# Altium PCB UKU205.PcbDoc (part 2 of 3)
Units mm, origin at the board's own origin, x right, y up, seen from the top; angles counter-clockwise.
Board outline 374.65 x 264.35 mm, 2 copper layers (Top Layer, Bottom Layer); 253 components, 433 nets, 927 pads, 929 vias.
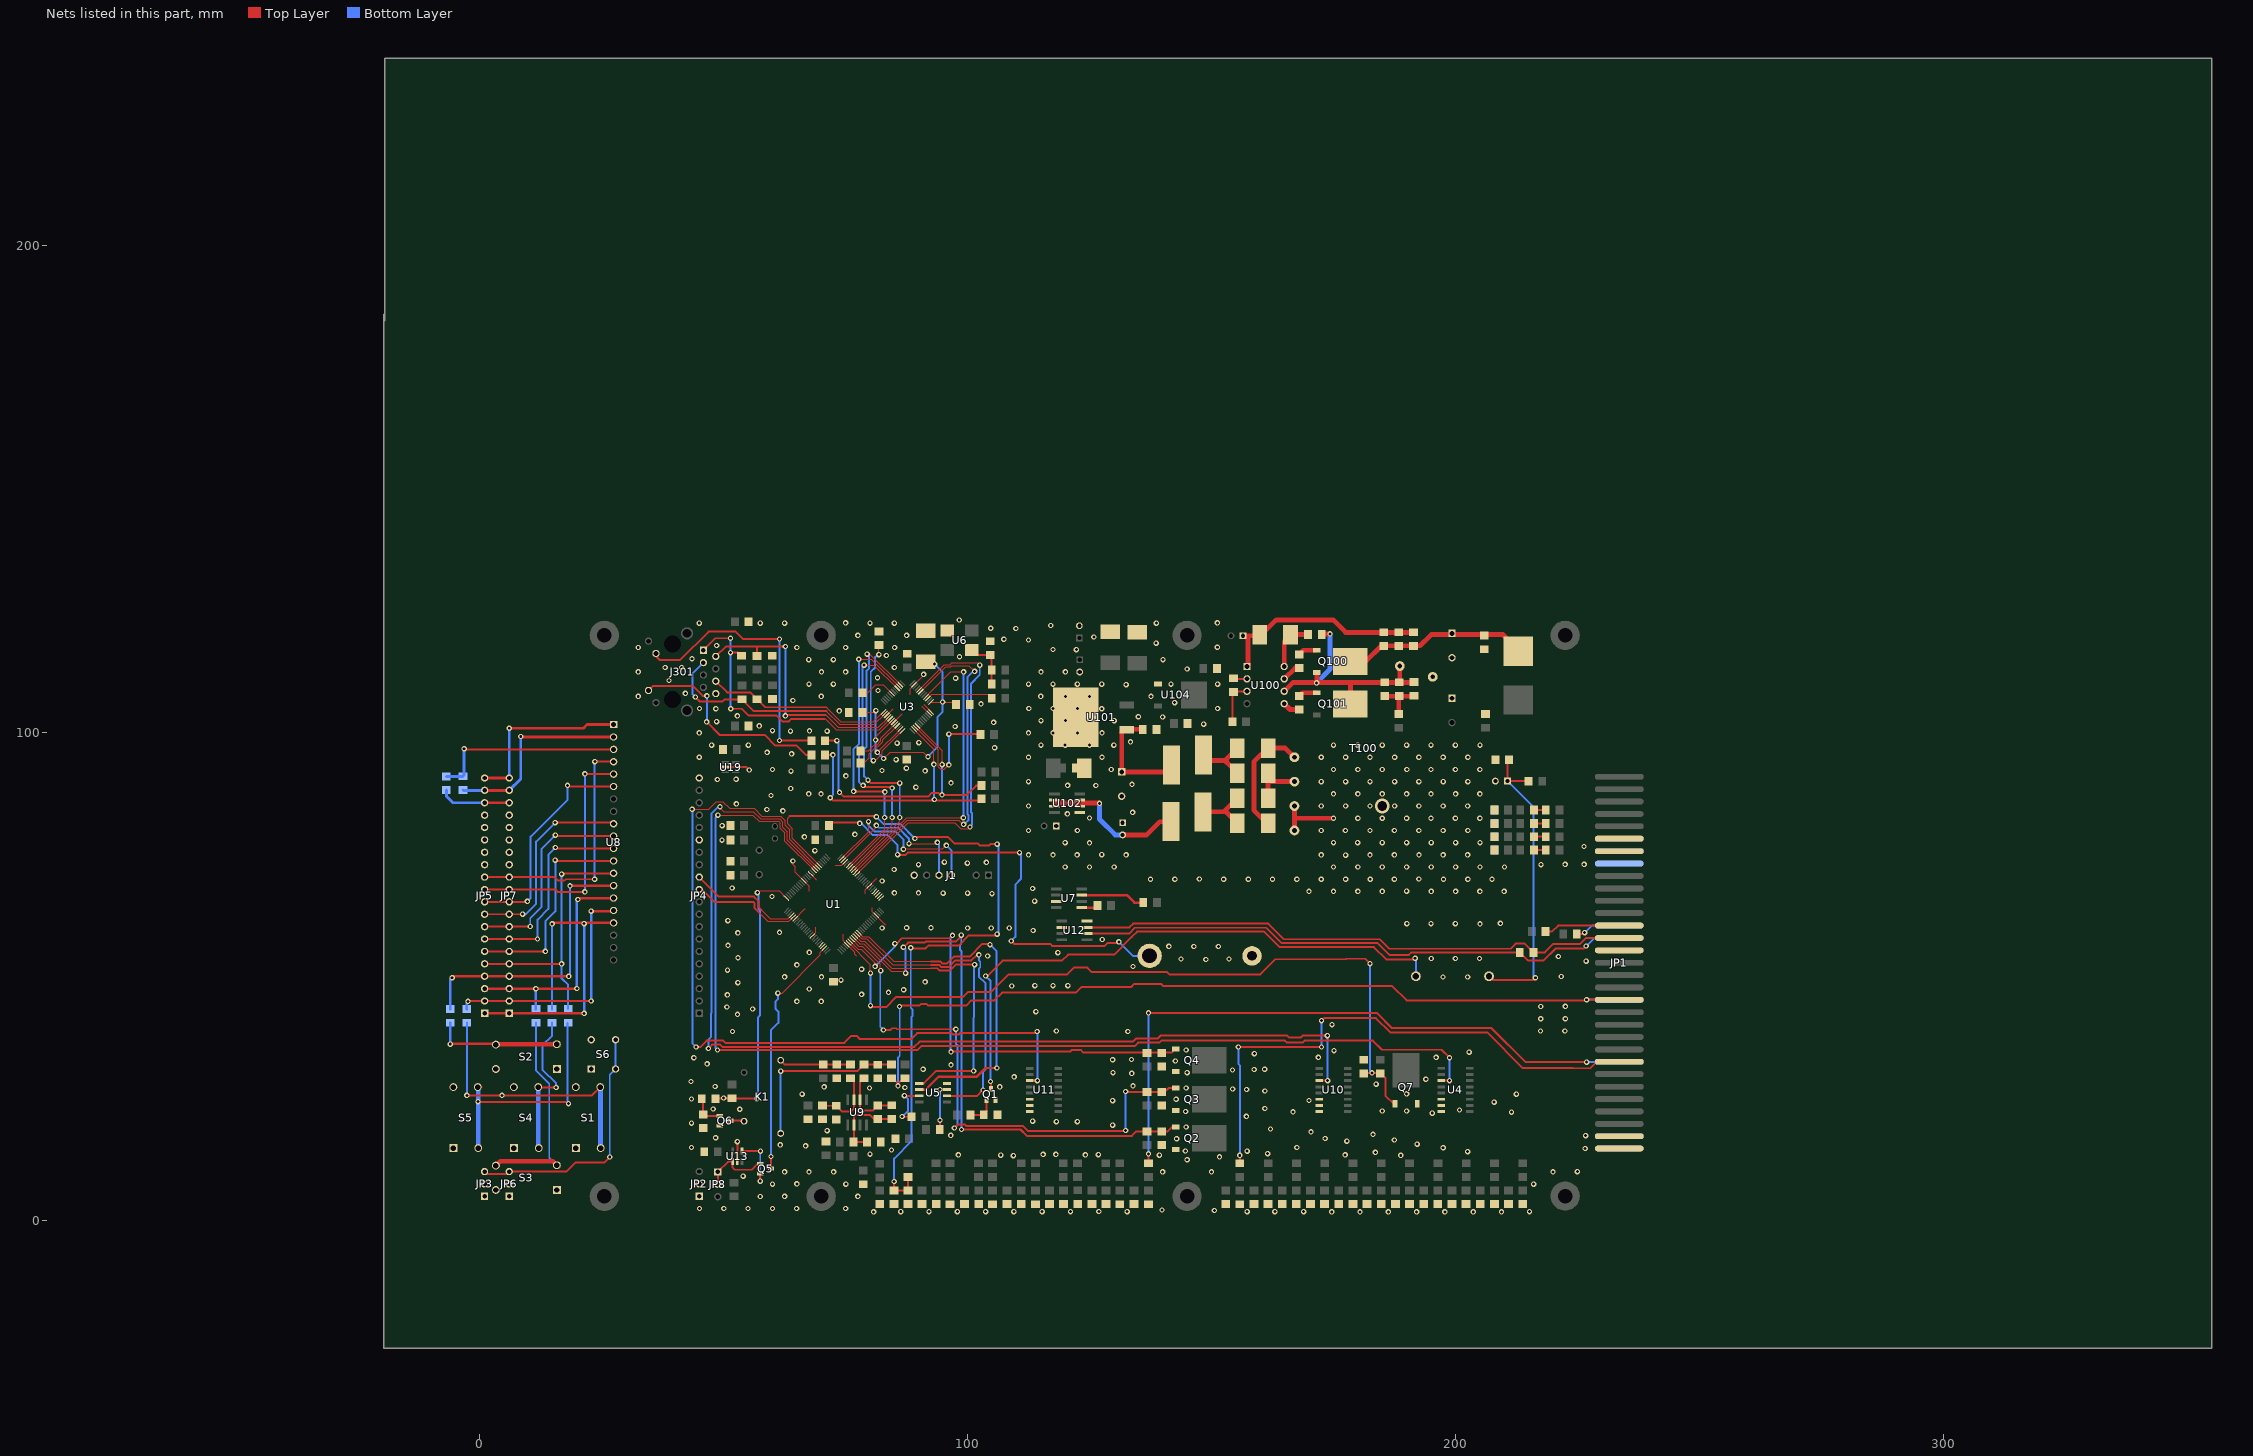
[diagram p2: the nets of this part, all layers, seen from the top]

## Via types
v1: diameter 1.1, hole 0.6, Top Layer to Bottom Layer, 928 vias
v2: diameter 3, hole 2, Top Layer to Bottom Layer, 1 vias

## Nets (pads, with @x,y where several pads share a name; then routed paths per layer and width w, separated by ;. In a path a pad name is that pad's centre, name@x,y a point inside that pad or via, vN(x,y) a via of type N, cw(c..) or ccw(c..) an arc to the next point about the centre after c; other vN are vias at no path point) (continued)
-IAKB: JP1.37 JP1.38 R61.2 R62.2 | length 177.7
  Top Layer w0.4: R61.2@84.393,29.212 84.588,29.212 v1@85.75,28.05 ; v1@85.719,28.081 86.938,29.3 R62.2@87.2,29.3 ; v1(86.05,43.9) 86.3,44.15 90.2,44.15 90.45,44.4 91.6,44.4 91.85,44.15 99.8,44.15 100.8,45.15 105.5,45.15 107.1,46.75 122.2,46.75 123.35,47.9 133.5,47.9 134.1,48.5 139.75,48.5 140.15,48.1 187.05,48.1 190,45.15 226.75,45.15 v1(226.9,45.3) ; v1(226.9,45.3) JP1.37@233.589,45.3
  Bottom Layer w0.4: v1@85.75,28.05 85.75,33.45 86.1,33.8 v1@86.1,43.95 ; v1(226.9,45.3) 233.564,45.3 JP1.38@233.589,45.275
  other v1: 85.75,27.65
-UOUT: 
CANH: JP1.27 R129.2 U12.7 | length 114
  Top Layer w0.4: U12.7@124.489,60.132 133.182,60.132 133.95,60.9 161.65,60.9 164.85,57.7 184.5,57.7 186.45,55.75 211.3,55.75 212.35,56.8 214.181,56.8 R129.2@215.988,54.993 218.343,54.993 220.1,56.75 225.55,56.75 226.75,57.95 JP1.27@233.589,57.95
CANL: JP1.28 R129.1 U12.6 | length 114.6
  Top Layer w0.4: U12.6@124.489,58.862 133.112,58.862 134.3,60.05 161.25,60.05 164.4,56.9 184.05,56.9 186.45,54.5 190.45,54.5 190.9,54.95 213.05,54.95 R129.1@213.1,55 ; R129.1@213.188,54.993 214.831,53.35 218.1,53.35 220.55,55.8 226.3,55.8 v1(226.8,56.3)
  Bottom Layer w0.4: v1(226.8,56.3) 228.45,57.95 JP1.28@233.589,57.95
DB4: 
GND: BT1.2 C1.2 C2.2 C3.2 C4.2 C5.2 C6.2 C7.2 C8.2 C9.2 C10.2 C11.1 C12.2 C13.2 C15.1 C16.1 C17.1 C18.2 C19.2 C20.2 C21.1 C22.1 C23.2 C24.1 C25.1 C31.1 C33.1 C34.2 C35.2 C36.1 C37.1 C38.1 C39.1 C40.1 C41.1 C42.2 C43.2 C44.2 C45.2 C46.2 C47.2 C48.2 C49.2 C50.2 C51.2 C52.2 C53.2 C54.2 C55.2 C56.2 C57.1 C58.2 C101.2 C102.2 C104.1 C105.1 C109.1 C110.2 C301.1 C302.1 C303.1 C304.1 D1.1 D3.1 D4.1 D5.1 D7.1 D8.1 J1.7 J301.8 JP1.11 JP1.12 JP1.13 JP1.14 JP1.59 JP1.60 JP1.61 JP1.62 JP2.1 JP2.2 JP4.20 Q1.2 Q2.3 Q3.3 Q4.3 Q6.2 Q7.3 R10.2 R12.2 R13.2 R14.2 R15.2 R16.2 R23.1 R24.1 R26.1 R27.1 R28.1 R36.1 R49.1 R57.1 R58.1 R60.1 R74.2 R75.2 R76.2 R77.2 R78.2 R111.1 R112.1 R113.1 R114.1 R117.1 R118.1 R122.2 R126.2 R127.2 R128.2 T100.4 T100.5 U1.11 U1.15 U1.31 U1.41 U1.55 U1.72 U1.83 U1.97 U3.15 U3.19 U3.35 U3.36 U3.47 U4.6 U4.7 U4.8 U5.4 U6.2 U7.3 U10.6 U10.7 U10.8 U11.6 U11.7 U11.8 U12.2 U12.8 U13.2 U19.2 U101.2 U102.5 U104.1 | length 66.5
  Top Layer w0.25: v1@64,73.25 64.7,72.55 64.7,71.386 67.5,68.586 67.5,67.5 ; U1.31@64.645,61.895 66.65,63.9 66.7,63.9 ; U1.11@67.827,71.087 69,69.914 69,69.9 ; U1.41@68.181,58.359 68.9,59.078 68.9,60.2 ; 72.9,72.85 74.186,72.85 U1.97@74.898,73.562 ; 74.5,58.7 74.5,57.343 76.85,54.993 76.85,54.604 77.142,54.312 ; 79.05,67 79.05,67.814 81.4,70.164 ; 80.5,63.364 83.15,60.714 83.15,60.7 ; 80.5,63.364 80.5,64.15 ; U3.15@83.448,103.597 84.751,104.9 ; U3.19@84.862,102.183 86.579,103.9 ; 88.2,107.8 88.2,109.056 v1@91,111.856 ; 90.65,105.5 90.65,105.481 U3.35@92.18,103.95 ; 90.988,105.85 U3.36@92.534,104.304
  Top Layer w0.4: U19.2@50.334,92.992 54.658,92.992 v1(55.25,92.4) ; U13.2@52.8,12.125 v1(52.8,16.2)
  Top Layer w1: T100.4@167,80 T100.5@167,85 ; 167,82.5 v1(175,82.5)
  other v1: 80.75,1.8 174.65,1.8 180.45,1.8 186.25,1.8 192.05,1.8 197.85,1.8 203.65,1.8 209.45,1.8 86.3,1.85 92.1,1.85 97.9,1.85 103.7,1.85 109.5,1.85 115.3,1.85 121.1,1.85 132.7,1.85 157.299,1.85 162.999,1.85 168.899,1.85 215.199,1.85 126.9,1.9 150.6,2.1 139.85,2.2 45.05,2.5 50.05,2.5 55,2.5 60,2.5 64.95,2.5 75,2.5 57.5,4.95 62.5,5 77.5,5 60,7.5 75.05,7.5 216.05,7.5 65,7.55 54,9.15 62.5,10 62.5,10 67.5,10 72.55,10 140,10 150,10 219.999,10 224.999,10.05 145,12.5 151.65,13.1 109.4,13.35 188.799,13.4 106.8,13.45 139.3,13.45 98.1,13.5 124.15,13.5 177.399,13.5 126.8,13.55 115.5,13.6 118.1,13.6 80,13.65 161.499,13.75 183.6,14 202.499,14.15 157.299,14.25 144.65,14.3 84.4,14.5 226.599,14.8 197.499,14.95 43.4,15 167.499,15 66.8,15.35 61.6,15.55 192.15,15.7 177.75,16.3 187.499,16.55 142.85,16.8 173.299,16.85 48.35,17 226.699,17.45 96.55,17.5 183.1,17.7 170.399,18.2 71.2,18.45 162.1,18.8 144.8,19.2 129.75,19.6 43.4,20 118.2,20.3 122.5,20.3 113.35,20.4 157.15,21.4 195.25,22.05 211.499,22.25 166.7,22.3 144.7,22.4 184.999,22.5 190,22.5 200.85,22.7 53.3,22.85 47.85,22.9 160.95,23 207.95,24.3 129.75,24.6 169.999,24.65 142.75,24.9 43.4,24.95 66.1,25.95 212.499,25.95 189.999,26 160.95,26.6 157.199,26.9 154.35,27 79.9,27.2 144.8,27.2 87.15,27.3 70.6,27.45 106.6,27.45 48.25,27.5 133.9,27.65 183.75,28 43.3,28.55 193.95,29 109.55,29.5 133.65,30.2 129.8,30.35 145,30.35 154.3,30.9 158.75,31 90.9,31.05 160.899,31.05 96.6,31.95 46.6,32.15 142.6,32.75 129.75,33 133.6,33.05 43.9,33.4 171.9,33.5 196.05,33.5 158.799,34.25 202.8,34.55 175.099,34.85 144.8,35 51.8,38.8 132.85,38.8 118.2,38.9 217.45,38.9 222.45,38.9 174.7,40.2 217.5,41.4 222.55,41.4 52.85,42.3 114,42.85 55.95,43.4 50.65,43.8 217.5,43.9 222.55,43.95 65,44.95 70,44.95 50.75,46.3 78.3,46.4 83.8,46.8 86.9,47.35 67.55,47.5 109.05,48.1 113.8,48.2 117.5,48.2 120.55,48.2 52.9,48.8 91.3,48.95 74.05,49.3 197.45,49.95 202.5,49.95 62.5,50 70.05,50 221.7,50.05 50.8,51.35 78.3,51.55 133.9,52.1 65,52.45 226.8,53.2 148.85,53.55 143.75,53.65 153.6,53.65 195.05,53.75 200,53.75 204.95,53.75 52.95,53.9 221.1,54.15 104.1,54.25 118.5,54.95 67.55,55 146.4,56.2 151.4,56.2 141.25,56.25 50.9,56.45 127.6,57.65 52.9,59 61.45,59.1 113.45,59.5 82.5,60 100,60 104.85,60 108.55,60 87.5,60.05 92.5,60.05 205.05,60.85 190.05,60.9 195,60.9 200,60.9 209.2,60.95 50.85,61.5 113.75,65.5 59.9,66.45 105,67.05 95,67.15 100,67.15 85,67.2 89.95,67.2 170,67.5 175,67.5 179.999,67.5 184.999,67.5 195.05,67.5 200.05,67.5 205,67.5 210,67.5 189.999,67.55 113.35,68.1 51.75,68.2 82.5,69.65 137.5,70 142.5,70 152.5,70 157.55,70 162.5,70 167.5,70 172.499,70 177.499,70 182.55,70 187.499,70 197.55,70 202.55,70 207.5,70 147.5,70.05 192.499,70.05 84.95,72 120,72.5 125,72.5 130.05,72.5 174.999,72.5 180,72.5 185,72.5 189.999,72.5 195.05,72.5 200.05,72.5 205.05,72.5 210.05,72.5 89.95,73 217.55,73 222.499,73.05 226.399,73.05 99.95,73.3 103.85,73.45 95.25,73.5 64.2,73.75 177.499,74.95 112.5,75 117.5,75 122.45,75 132.5,75 172.499,75 182.5,75 187.499,75 192.55,75 197.499,75 202.5,75 127.5,75.05 68.7,75.85 226.35,76.7 125,77.45 120,77.5 174.999,77.5 179.95,77.5 185,77.5 189.999,77.5 195.05,77.5 200.05,77.5 205.05,77.5 49.65,78 66.55,78.7 76.9,79.2 112.5,80 122.5,80 172.5,80 177.45,80 182.5,80 187.5,80 192.5,80 197.499,80 202.55,80 49.7,81 179.999,82.5 184.999,82.5 190,82.5 195,82.5 200,82.5 205,82.5 125,82.55 120.45,83.4 133.85,83.7 62.15,84 58.85,84.3 112.5,85 172.499,85 177.499,85 182.499,85 187.55,85 192.499,85 197.499,85 202.499,85 52.6,85.45 59.7,87.15 67.45,87.5 69.95,87.5 174.999,87.5 180,87.5 185,87.5 189.999,87.5 194.999,87.5 200.05,87.5 205,87.5 63.75,88.6 89.4,88.85 126.3,89.2 120.5,89.25 133.7,89.45 96.6,89.75 112.5,90 172.5,90 177.499,90 182.499,90 187.55,90 192.5,90 197.5,90 202.55,90 48.7,90.45 52.55,90.5 75.05,91.2 63.8,92.15 91.3,92.2 82.45,92.3 60,92.5 129.45,92.5 174.999,92.5 180,92.5 185,92.5 190.05,92.5 194.999,92.5 200,92.5 205,92.5 87.45,92.75 85.35,94.5 45,95 112.5,95 127.55,95 172.499,95 177.5,95 182.499,95 187.55,95 192.499,95 197.499,95 202.55,95 63.95,95.7 58.9,96 105.55,96.95 47.55,97.5 55.05,97.5 115.05,97.5 120,97.5 125,97.5 130,97.5 174.999,97.5 180,97.5 184.999,97.5 189.999,97.5 195,97.5 199.999,97.5 205.05,97.5 85.55,97.9 90,98 133.4,98.15 45,100 112.5,100 117.55,100 122.5,100 127.55,100 63.7,100.35 71.2,100.35 67.6,100.4 60,100.45 97.45,101.3 57.3,101.45 148.4,101.8 105.35,102.15 48.55,102.3 115.05,102.5 120.05,102.5 125.05,102.5 130.05,102.5 140,103.25 135,103.3 52.8,103.5 73.7,104.5 48.4,104.95 127.5,104.95 45.05,105 112.55,105 117.55,105 122.55,105 151.25,105 102.75,105.95 142.45,106.2 64.2,106.65 32.5,107.5 70,107.5 115,107.5 120.05,107.5 125,107.5 137.6,107.5 42.15,108.1 81.65,108.7 132.5,109.9 67.5,110 72.5,110 112.5,110 117.5,110 122.5,110 127.5,110 141.7,110 151.25,110 38.8,110.75 97.55,111.2 81.55,111.3 91,112 32.5,112.5 70.05,112.5 75,112.5 115.05,112.5 120.05,112.5 145,113.1 38,113.4 41.4,113.4 85,113.4 67.45,115 72.5,115 140.05,115 43.5,115.2 98.35,115.6 83.35,115.85 122.3,117.05 117.5,117.1 32.5,117.5 65,117.5 75,117.5 85.05,117.5 151.2,117.55 48.55,117.9 138.65,118.4 112.5,119.05 107.45,119.2 125.9,119.65 77.5,120 87.5,120 109.9,121.4 104.75,121.45 117.05,122 45,122.5 57.5,122.5 62.5,122.5 80,122.5 85,122.5 138.7,122.5 75,122.55 151.2,122.55 98.3,123.15
  other v2: 185,85
I1: JP1.47 R6.2 | length 112.5
  Top Layer w0.4: v1(155.5,35.6) v1(172.55,35.6) ; v1(155.8,13.4) 155.807,13.393 R6.2@155.807,11.788 ; v1(172.55,41) 173.1,41.55 183.7,41.55 186.65,38.6 206.5,38.6 213.8,31.3 224.1,31.3 224.15,31.25 227.65,31.25 228.975,32.575 JP1.47@233.589,32.575
  Bottom Layer w0.4: v1(155.5,35.6) 155.5,32.15 155.807,31.843 v1@155.807,13.393 ; v1(172.55,35.6) v1(172.55,41)
I2: JP1.48 R7.2 | length 131.5
  Top Layer w0.4: v1@137.1,13.2 137.107,13.193 R7.2@137.107,11.788 ; v1(137.1,42.6) 137.5,42.55 183.95,42.55 187,39.5 207.4,39.5 214.4,32.5 v1(226.9,32.5)
  Bottom Layer w0.4: v1@137.1,13.2 v1(137.1,42.6) ; v1(226.9,32.5) 233.515,32.5 JP1.48@233.589,32.575
  other v1: 137.1,13.7
NetA1_1: A1.1 Q1.3 | length 121.7
  Top Layer w0.4: v1(103.7,50.15) 104.05,50.15 107.2,53.3 119.35,53.3 120.6,54.55 130.05,54.55 133.693,58.193 134.75,59.25 160.8,59.25 163.95,56.1 183.3,56.1 185.85,53.55 191.5,53.55 v1(191.75,53.8) ; v1(104.7,28.55) 104.8,28.55 104.802,28.548 Q1.3@104.802,26.998
  Bottom Layer w0.4: v1(103.7,50.15) 104.7,49.15 v1(104.7,28.55) ; v1(191.75,53.8) 191.897,53.653 A1.1@191.897,50.112
NetA1_2: A1.2 C19.1 R56.1 R57.2 | length 61.5
  Top Layer w0.4: A1.2@206.897,50.112 207.66,49.35 215.95,49.35 v1(216.4,49.8) ; R57.2@211,94.45 210.657,94.107 210.657,90.093 R56.1@214.988,90.093
  Bottom Layer w0.4: C19.1@210.689,90.108 216.05,84.747 216.05,50.15 v1(216.4,49.8)
NetBT1_1: BT1.1 D6.1 | length 92.8
  Top Layer w0.4: D6.1@71.595,80.991 72.254,81.65 77.7,81.65 v1(77.9,81.45) ; v1(85.65,75.05) 85.75,74.95 87.25,74.95 87.75,75.45 v1(110.65,75.45) ; v1(108.95,57.35) 109.55,56.75 116.95,56.75 117.35,56.35 128.1,56.35 128.65,56.9 130.75,56.9 v1(131,57.15)
  Bottom Layer w0.4: v1(77.9,81.45) 78.2,81.45 80.6,79.05 83.6,79.05 85.65,77 v1(85.65,75.05) ; v1(108.95,57.35) 109.8,58.2 109.8,68.9 110.95,70.05 110.95,75.15 v1(110.65,75.45) ; v1(131,57.15) 133.859,54.291 BT1.1@137.305,54.291
NetC9_1: C9.1 C10.1 C20.1 U3.18 U3.23 U3.37 | length 63.9
  Top Layer w0.25: C10.1@78.455,104.198 80.748,104.198 v1@81.1,104.55 ; v1(81.15,98.55) 81.15,99.178 U3.18@84.508,102.536 ; v1(81.5,96) 81.508,96 U3.23@86.276,100.768 ; v1(82.8,94.75) 84.1,96.05 90.95,96.05 v1(91.9,95.1) ; U3.37@92.534,106.319 97.128,106.319 C9.1@97.645,105.802
  Top Layer w0.4: C20.1@91.25,114.55 92.761,114.589 v1(93.25,114.1)
  Bottom Layer w0.4: v1@81.1,104.55 81.15,104.5 81.15,96.4 81.525,96.025 v1(82.8,94.75) ; v1(91.9,95.1) 91.95,95.15 91.95,95.2 93.8,97.05 93.8,103.2 94.9,104.3 94.9,112.45 v1(93.25,114.1)
  other v1: 81.2,104.55 94.9,106.319
NetC18_1: C18.1 R50.1 R51.1 U6.4 | length 10.3
  Top Layer w0.4: U6.4@100.85,117 101.862,115.988 C18.1@104.657,115.988 104.938,115.707 R50.1@104.938,112.893 R51.1@104.938,109.993
NetC22_2: C22.2 K1.1 R61.1 R64.1 | length 36.2
  Top Layer w0.4: v1(61.7,30.65) 77.431,30.65 R64.1@78.793,32.012 R61.1@84.393,32.012 ; R64.1@78.75,31.9 R64.1@78.862,32.012
  Bottom Layer w0.4: K1.1@61.69,17.894 61.69,30.64 v1(61.7,30.65)
NetC23_1: C23.1 K1.3 R63.1 R65.1 | length 15.5
  Top Layer w0.4: K1.3@61.69,32.894 62.572,32.012 R65.1@75.993,32.012 ; R63.1@69.794,32.506 R63.1@70.4,31.9
NetC24_2: C24.2 C32.2 R59.1 R66.1 U9.6 | length 16.2
  Top Layer w0.4: U9.6@76.712,19.611 76.712,21.212 77.15,21.65 80.05,21.65 80.85,20.85 84.431,20.85 C32.2@84.443,20.862 ; U9.6@76.75,19.7 76.75,16.25 76.65,16.15 76.7,16.1 C24.2@79.35,16.1
NetC26_1: 
NetC26_2: 
NetC27_1: 
NetC29_1: 
NetC29_2: 
NetC30_1: 
NetC32_1: C32.1 R59.2 R64.2 U9.2 | length 13.7
  Top Layer w0.4: R64.2@78.793,29.212 77.982,28.401 U9.2@77.982,24.811 77.982,22.918 78.35,22.55 80.519,22.55 81.631,23.662 C32.1@84.443,23.662
NetC35_1: C35.1 R60.2 R65.2 U9.3 | length 13.7
  Top Layer w0.4: R60.2@70.257,23.588 70.282,23.562 C35.1@73.093,23.562 74.256,22.4 76.15,22.4 76.712,22.962 U9.3@76.712,24.811 76.712,28.493 R65.2@75.993,29.212
NetC100_1: C100.1 D100.1 R100.2 R101.2 R102.2 U100.1 | length 43.9
  Top Layer w1: C100.1@156.489,119.908 160.008,119.908 163.3,123.2 ; U100.1@157.3,113.55 157.5,113.75 157.5,119.9 ; 163.3,123.15 174.95,123.15 177.5,120.6 185.45,120.6 R102.2@191.5,120.6
NetC101_1: C101.1 C109.2 L100.2 U101.1 | length 23.6
  Top Layer w0.7: L100.2@141.768,93.393 L100.2@141.793,93.393
  Top Layer w1: C109.2@135.905,100.698 135.852,100.75 132,100.75 131.593,100.343 C101.1@131.593,92.001 140.401,92.001 141.78,93.38 L100.2@141.793,93.393
NetC103_1: C103.1 FU100.2 Q100.4 R100.1 R101.1 R102.1 R103.1 | length 38.2
  Top Layer w1: Q100.4@178.419,114.65 181.65,114.65 184.85,117.85 191.65,117.85 192.749,117.85 195.049,120.15 199.9,120.15 209.75,120.15 212.7,117.2 FU100.2@212.7,116.8
NetC103_2: C103.2 C106.1 R103.2 R109.1 T100.1
NetC104_2: C104.2 L101.2 U102.2 U102.3 U102.6 U102.7 | length 29.6
  Top Layer w1: 117.8,85.6 127,85.6 v1(127.05,85.55) ; C104.2@131.75,79.1 136.689,79.089 139.393,81.793 L101.2@141.668,81.793
  Bottom Layer w1: v1(127.05,85.55) 127.05,82.3 130.25,79.1 C104.2@131.75,79.1
NetC111_1: C111.1 D100.2 U100.8 | length 10.4
  Top Layer w1: U100.8@164.904,113.603 164.904,118.79 D100.2@166.209,120.094 ; D100.2@166.402,120.152 C111.1@169.795,120.152
NetC111_2: C111.2 Q100.3 Q101.4 R106.1 R107.1 R108.1 T100.2 U100.6 | length 49.4
  Top Layer w1: U100.6@164.904,108.523 166.681,110.3 191.381,110.3 R106.1@191.494,110.413 ; v1@171.65,110.4 Q100.3@171.65,112.3 ; C111.2@172.55,120.25 173.8,120.25 v1@173.85,120.3 ; Q101.4@178.4,106 178.5,106.1 178.5,110.3 ; R107.1@188.6,110.3 T100.2@188.6,113.55
  Bottom Layer w1: v1(171.55,110.25) 171.55,110.3 174.3,113.05 v1(174.3,120.3)
NetC114_1: C114.1 R105.1 U100.3 | length 9
  Top Layer w0.4: C114.1@154.288,102.293 154.288,108.169 R105.1@154.507,108.388 154.642,108.523 U100.3@157.284,108.523
NetC117_1: C117.1 R106.2 R107.2 R108.2 | length 10
  Top Layer w1: R108.2@185.3,107.5 191.6,107.5 R106.2@191.65,107.45 ; C117.1@188.393,103.862 188.393,107.443 R107.2@188.45,107.5
NetD101_1: D101.1 D102.2 T100.3 | length 24.6
  Top Layer w1: D102.2@161.45,81.4 158.7,84.15 158.7,94.05 D101.1@162.05,97.4 ; D101.1@161.659,96.869 165.131,96.869 T100.3@167,95
NetD101_2: D101.2 D103.2 L100.1 | length 12.3
  Top Layer w1: L100.1@148.372,95.425 149.497,94.3 153.05,94.3 ; D103.2@155.309,91.706 155.344,91.706 153,94.05 153,94.559 D101.2@155.309,96.869
NetD102_1: D102.1 D104.1 L101.1 | length 11.9
  Top Layer w1: L101.1@148.272,83.825 152.965,83.825 ; D102.1@155.309,81.481 152.9,83.891 152.9,84.235 D104.1@155.309,86.644
NetD103_1: D103.1 D104.2 T100.6 | length 11.7
  Top Layer w1: D103.1@161.6,89.85 161.75,90 T100.6@167,90 ; D104.2@161.65,86.55 161.607,86.593 161.6,86.6 161.6,91.7 D103.1@162.35,92.45
NetJ301_1: J301.1 R301.1 U3.17 | length 59.4
  Top Layer w0.25: 70.65,102.85 70.85,102.85 73.1,100.6 81.865,100.6 U3.17@84.155,102.89
  Top Layer w0.4: J301.1@45.85,116.945 48.305,119.4 v1(51.4,119.4) ; v1(51.4,116.45) 53.006,116.45 R301.1@53.643,115.813 R301.1@53.626,115.795 ; v1(51.45,104.95) 53.7,104.95 55.1,103.55 60.85,103.55 62.05,102.35 63.35,102.35 63.85,102.85 70.65,102.85
  Bottom Layer w0.4: v1(51.4,119.4) 51.4,105 v1(51.45,104.95)
NetJ301_2: J301.2 R302.2 U3.16 | length 54.6
  Top Layer w0.25: 70.9,103.7 73.45,101.15 81.708,101.15 U3.16@83.801,103.243
  Top Layer w0.4: J301.2@48.4,115.675 50.425,117.7 v1(62.65,117.7) ; 56.8,117.7 56.857,117.643 R302.2@56.857,115.788 ; v1(62.65,103.5) 62.85,103.7 70.9,103.7
  Bottom Layer w0.4: v1@62.65,103.3 v1(62.65,117.7)
NetJ301_3: J301.3 R303.1 U3.14 | length 51.8
  Top Layer w0.25: 71.05,104.45 73.75,101.75 80.894,101.75 U3.14@83.094,103.95
  Top Layer w0.4: v1(44.2,107.35) 45.15,106.4 49.75,106.4 50.15,106.8 53.669,106.8 R303.1@53.757,106.888 ; R303.1@54.497,106.147 R303.1@53.757,106.888 ; 71.05,104.45 56.194,104.45 R303.1@53.757,106.888
  Bottom Layer w0.4: v1(44.2,107.35) 43.65,107.9 43.65,112.205 J301.3@45.85,114.405
NetJ301_6: J301.6 R304.2 U3.13 | length 41.2
  Top Layer w0.25: 71.05,105.25 74.05,102.25 80.687,102.25 U3.13@82.74,104.304
  Top Layer w0.4: J301.6@48.4,110.595 50.695,108.3 55.456,108.3 58.506,105.25 62.7,105.25 ; 60.15,105.25 71.05,105.25
NetJ301_10: J301.10 R305.1 | length 56.6
  Top Layer w0.4: J301.10@36.12,116.27 36.12,115.68 36.85,114.95 41.1,114.95 46.9,120.75 52.45,120.75 53.95,119.25 v1(61.45,119.25) ; v1(61.45,98.45) 61.507,98.393 R305.1@67.988,98.393
  Bottom Layer w0.4: v1(61.45,98.45) v1(61.45,119.25)
NetJ301_11: J301.11 R306.1 | length 42.8
  Top Layer w0.4: J301.11@34.6,108.7 35.55,109.65 43.65,109.65 45.7,107.6 v1(46.55,107.6) ; v1(46.5,102.25) 49.15,99.6 58.4,99.6 60.6,97.4 64.95,97.4 66.857,95.493 R306.1@67.988,95.493
  Bottom Layer w0.4: v1@46.55,102.25 v1(46.55,107.6)
NetJP1_16: JP1.16
NetJP1_29: JP1.29
NetJP3_1: JP3.1 JP3.2 JP5.13 JP5.14 JP5.15 JP5.16 JP5.17 JP5.20 JP6.1 JP6.2 JP7.13 JP7.14 JP7.15 JP7.16 JP7.17 JP7.20 S1.1 S2.1 S3.1 S4.1 S5.1 S6.1 U8.1 | length 37
  Top Layer w0.6: JP5.20@1,90.76 JP7.20@6.05,90.76 ; v1(6.05,100.95) 21.25,100.95 22,101.7 U8.1@27.45,101.7
  Bottom Layer w0.6: JP7.20@6.05,90.76 v1(6.05,100.95)
NetJP3_3: JP3.3 JP6.3 S6.2 | length 51.2
  Top Layer w0.4: JP3.3@1.46,9.6 5.568,9.6 JP6.3@6.039,10.071 10.971,10.071 11,10.1 17.8,10.1 19.6,11.9 25.5,11.9 v1(26.65,13.05)
  Bottom Layer w0.4: v1(26.65,13.05) 26.65,29.89 S6.2@27.851,31.091 S6.2@27.851,37.091
NetJP4_15: JP4.15
NetJP5_1: JP5.1 JP7.1 R4.2 U8.17 | length 69.2
  Top Layer w0.5: JP5.1@1,42.5 v1(21.4,42.5) ; v1(14.85,60.85) 15.06,61.06 U8.17@27.45,61.06 ; v1(21.4,60.9) v1@21.56,61.06
  Bottom Layer w0.5: R4.2@14.817,43.388 14.817,60.817 v1(14.85,60.85) ; v1(21.4,42.5) v1(21.4,60.9)
NetJP5_2: JP5.2 JP7.2 R1.2 U8.16 | length 50
  Top Layer w0.5: v1(-2.4,44.95) -2.31,45.04 22.84,45.04 v1(22.85,45.05) ; v1(22.85,63.45) 27.3,63.45 U8.16@27.45,63.6
  Bottom Layer w0.5: R1.2@-2.657,43.388 -2.657,44.693 v1(-2.4,44.95) ; v1(22.85,45.05) v1(22.85,63.45)
NetJP5_3: JP5.3 JP7.3 R3.2 U8.15 | length 48.9
  Top Layer w0.5: JP5.3@1,47.58 19.88,47.58 v1(19.9,47.6) ; v1(20.1,65.85) 20.39,66.14 U8.15@27.45,66.14
  Bottom Layer w0.5: v1(11.5,47.55) 11.509,47.541 R3.2@11.509,43.388 ; v1(19.9,47.6) 19.9,65.65 v1(20.1,65.85)
NetJP5_4: JP5.4 JP7.4 R2.2 U8.14 | length 58.2
  Top Layer w0.5: v1(-5.65,49.8) -5.33,50.12 18.23,50.12 v1(18.25,50.1) ; v1(18.5,68.65) 18.53,68.68 U8.14@27.45,68.68
  Bottom Layer w0.5: R2.2@-6.057,43.388 -6.057,49.393 v1(-5.65,49.8) ; v1(18.25,50.1) 18.5,50.35 v1(18.5,68.65)
NetJP5_5: JP5.5 JP7.5 R5.2 U8.13 | length 54.7
  Top Layer w0.4: JP5.5@1,52.66 v1(16.79,52.66) v1@16.8,52.65 ; v1(16.8,71.05) 16.97,71.22 U8.13@27.45,71.22
  Bottom Layer w0.4: v1(16.8,71.05) 16.8,49.65 18.125,48.325 R5.2@18.125,43.388
NetJP5_6: JP5.6 JP7.6 U8.12 | length 44.1
  Top Layer w0.4: JP5.6@1,55.2 v1(13.45,55.2) ; v1(15.45,73.9) 15.59,73.76 U8.12@27.45,73.76
  Bottom Layer w0.4: v1(13.45,55.2) 13.45,61.35 15.5,63.4 15.5,73.85 v1(15.45,73.9)
NetJP5_7: JP5.7 JP7.7 U8.11 | length 43.1
  Top Layer w0.4: JP5.7@1,57.74 11.84,57.74 v1(11.85,57.75) ; v1(15.5,76.5) 15.7,76.3 U8.11@27.45,76.3
  Bottom Layer w0.4: v1(11.85,57.75) 11.85,61.7 14.05,63.9 14.05,75.05 v1(15.5,76.5)
NetJP5_8: JP5.8 JP7.8 U8.10 | length 42.3
  Top Layer w0.4: JP5.8@1,60.28 10.33,60.28 v1(10.35,60.3) ; v1(15.5,79.05) 15.71,78.84 U8.10@27.45,78.84
  Bottom Layer w0.4: v1(10.35,60.3) 10.35,62 12.7,64.35 12.7,76.25 v1(15.5,79.05)
NetJP5_9: JP5.9 JP7.9 U8.9 | length 42
  Top Layer w0.4: JP5.9@1,62.82 8.87,62.82 8.9,62.85 v1(8.8,62.85) ; v1(15.45,81.6) 27.23,81.6 U8.9@27.45,81.38
  Bottom Layer w0.4: v1(8.8,62.85) 9.4,62.85 11.55,65 11.55,77.7 v1(15.45,81.6)
NetJP5_10: JP5.10 JP7.10 U8.6 | length 45.6
  Top Layer w0.4: JP5.10@1,65.36 9.66,65.36 v1(9.75,65.45) ; v1(18,89.25) 18.25,89 U8.6@27.45,89
  Bottom Layer w0.4: v1(9.75,65.45) 10.45,66.15 10.45,78.75 18,86.3 v1(18,89.25)
NetJP5_11: JP5.11 JP7.11 U8.5 | length 50.9
  Top Layer w0.4: JP5.11@1,67.9 15.45,67.9 15.95,67.4 v1(21.55,67.4) ; v1(21.55,91.6) 27.39,91.6 U8.5@27.45,91.54
  Bottom Layer w0.4: v1(21.55,67.4) v1(21.55,91.6)
NetJP5_12: JP5.12 JP7.12 U8.4 | length 50.9
  Top Layer w0.4: JP5.12@1,70.44 15.31,70.44 16,69.75 17.4,69.75 17.65,70 v1(23.55,70) ; v1(23.6,94.1) 27.43,94.1 U8.4@27.45,94.08
  Bottom Layer w0.4: v1(23.55,70) 23.55,94.05 v1(23.6,94.1)
NetJP5_18: JP5.18 JP7.18 R89.1 | length 14.7
  Top Layer w0.5: JP5.18@1,85.68 JP7.18@6.05,85.68
  Bottom Layer w0.6: R89.1@-6.857,88.288 -6.857,87.057 -5.48,85.68 JP5.18@1,85.68
NetJP5_19: JP5.19 JP7.19 R90.2 U8.2 | length 40.6
  Top Layer w0.6: JP5.19@1,88.22 JP7.19@6.05,88.22 ; v1(8.4,99.25) 8.49,99.16 U8.2@27.45,99.16
  Bottom Layer w0.6: R90.2@-3.443,88.312 -3.351,88.22 JP5.19@1,88.22 ; JP7.19@6.05,88.22 8.4,90.57 v1(8.4,99.25)
NetJP8_1: JP8.1 JP8.2 Q5.1 U13.1 | length 14
  Top Layer w0.4: JP8.2@48.8,7.46 JP8.1@48.8,10 50.925,12.125 U13.1@51.85,12.125 51.85,10.9 52.3,10.45 55.8,10.45 56.994,11.644 Q5.1@57.495,11.644
NetK1_5: K1.5 Q6.3 | length 2.8
  Top Layer w0.4: Q6.3@51.398,20.498 54.086,20.498 K1.5@54.19,20.394
NetQ1_1: Q1.1 R34.2 R36.2 | length 6
  Top Layer w0.4: R34.2@100.588,21.693 103.299,21.693 R36.2@103.312,21.707 103.852,22.246 Q1.1@103.852,24.798
NetQ5_2: Q5.2 U13.4 | length 11.6
  Top Layer w0.4: U13.4@53.75,14.275 57.525,14.275 v1(57.55,14.25) ; Q5.2@57.495,9.744 57.495,8.105 v1(57.5,8.1)
  Bottom Layer w0.4: v1(57.5,8.1) 57.5,14.2 v1(57.55,14.25)
NetQ6_1: Q6.1 R35.2 R58.2 | length 6.9
  Top Layer w0.4: R35.2@45.512,25.007 45.807,24.712 R58.2@45.807,21.788 46.146,21.448 Q6.1@49.198,21.448
NetQ100_1: Q100.1 R104.2 | length 3.9
  Top Layer w1: R104.2@168.007,116.088 168.854,116.935 Q100.1@171.569,116.935
NetQ101_1: Q101.1 R110.2 | length 3.8
  Top Layer w1: R110.2@168.007,107.588 168.654,108.235 Q101.1@171.569,108.235
NetR1_1: R1.1 S1.2 | length 55.6
  Top Layer w0.4: v1(-2.65,25.7) 23.012,25.7 S1.2@24.703,27.391
  Bottom Layer w0.4: R1.1@-2.657,40.588 -2.65,40.581 v1(-2.65,25.7)
  Bottom Layer w1: S1.2@24.7,27.5 24.756,27.444 24.783,27.417 S1.2@24.783,14.891
  other v1: 4.55,25.7
NetR2_1: R2.1 S2.2 | length 26.3
  Top Layer w0.5: v1(-6.05,36.2) -6,36.25 3.162,36.25 S2.2@3.309,36.103
  Top Layer w1: S2.2@3.389,36.183 S2.2@15.809,36.183
  Bottom Layer w0.5: R2.1@-6.057,40.588 -6.057,36.207 v1(-6.05,36.2)
NetR3_1: R3.1 S3.2 | length 44.2
  Top Layer w1: S3.2@3.309,11.303 4.206,12.2 14.992,12.2 S3.2@15.809,11.383
  Bottom Layer w0.4: R3.1@11.509,40.588 11.509,30.841 14.25,28.1 14.25,12.942 S3.2@15.809,11.383
NetR4_1: R4.1 S4.2 | length 31.5
  Top Layer w0.4: S4.2@12.003,27.391 12.094,27.3 v1(15.65,27.3)
  Bottom Layer w0.4: R4.1@14.817,40.588 14.817,37.917 12.85,35.95 12.85,30.95 15.65,28.15 v1(15.65,27.3)
  Bottom Layer w1: S4.2@12.003,27.391 12.003,14.971 S4.2@12.083,14.891
NetR5_1: R5.1 S5.2 | length 48.6
  Top Layer w0.4: S5.2@-0.397,27.391 S5.2@0.359,27.391 ; v1(-0.35,24.4) -0.3,24.35 17.85,24.35 v1(18.2,24)
  Bottom Layer w0.4: R5.1@18,40.55 18,24.2 v1(18.2,24)
  Bottom Layer w1: S5.2@-0.4,27.35 -0.317,27.267 S5.2@-0.317,14.891
NetR33_1: R33.1 U3.39 | length 13.8
  Top Layer w0.25: U3.39@91.827,107.026 92.7,107.9 104.131,107.9 R33.1@104.938,107.093
NetR37_1: R37.1 R306.2 U3.26 | length 57.9
  Top Layer w0.25: U3.26@88.998,100.768 93.1,96.667 v1(93.1,93.55) ; v1(93.2,86.35) v1@93.3,86.25
  Top Layer w0.4: R306.2@71.438,95.493 72.357,95.493 72.375,95.475 72.4,95.45 v1(72.4,95.5) ; v1(71.85,86.7) 72.45,86.1 102.444,86.1 R37.1@102.838,86.493
  Bottom Layer w0.4: v1(71.85,86.7) 72.4,87.25 v1(72.4,95.5) ; v1@93.15,93.6 v1(93.1,93.55) 93.1,86.35 v1(93.2,86.35)
NetR38_1: R38.1 R305.2 U3.28 | length 60.6
  Top Layer w0.25: U3.28@89.705,101.475 94.8,96.381 v1(94.8,93.5)
  Top Layer w0.4: R305.2@71.438,98.393 73.193,98.393 v1(73.2,98.4) ; v1(73.75,87.8) 74.6,86.95 91.9,86.95 92.551,87.601 ; R38.1@102.838,89.193 101.743,89.193 99.85,87.3 94.4,87.3 93.978,87.722 92.672,87.722 ; 92.551,87.601 92.672,87.722 ; 92.551,87.601 92.672,87.722
  Bottom Layer w0.4: v1(73.2,98.4) 73.5,98.1 v1@73.5,87.8 ; v1@73.5,88.05 v1(73.75,87.8) ; v1(94.75,87.3) v1@94.75,94 ; v1@94.75,93.45 v1(94.8,93.5)
NetR39_1: R39.1 U3.27 | length 25.9
  Top Layer w0.25: U3.27@89.352,101.122 93.95,96.524 93.95,93.1 94.55,92.5 95.2,92.5 v1(96.15,93.45)
  Top Layer w0.4: v1(96.15,99.75) 102.881,99.75 R39.1@102.938,99.693
  Bottom Layer w0.4: v1(96.15,93.45) v1(96.15,99.75)
NetR40_2: R40.2 U7.7 | length 13.3
  Top Layer w0.5: U7.7@123.389,66.732 132.668,66.732 134.193,65.207 R40.2@136.012,65.207
NetR41_2: R41.2 U7.5 | length 3.4
  Top Layer w0.5: U7.5@123.389,64.192 126.198,64.192 R41.2@126.612,64.607
NetR42_1: R42.1 U3.21 | length 11.4
  Top Layer w0.25: R42.1@78.062,93.807 78.757,93.807 79.85,94.9 79.85,95.757 81.243,97.15 81.616,97.15 82.65,98.184 82.65,98.557 U3.21@85.569,101.475
NetR43_2: 
NetR44_1: R44.1 U3.20 | length 9.7
  Top Layer w0.25: R44.1@78.062,96.307 79.693,96.307 80.503,97.117 80.936,97.55 81.45,97.55 82.25,98.35 82.25,98.864 U3.20@85.215,101.829
NetR45_1: R45.1 U3.7 | length 7.5
  Top Layer w0.25: R45.1@78.462,108.207 79.507,108.207 81.2,109.9 82.695,109.9 U3.7@84.508,108.087
NetR49_2: R49.2 U3.24 | length 33.1
  Top Layer w0.25: v1(80.7,94.3) 81.1,94.3 82.5,95.7 82.5,96.285 85.175,98.961 U3.24@86.63,100.415 ; R49.2@81.843,117.612 81.843,116.407 v1@81.85,116.4
  Bottom Layer w0.4: v1(80.7,94.3) 80.15,94.85 80.15,112.5 81.05,113.4 81.05,115.55 81.85,116.35 v1@81.85,116.4
  other v1: 81.8,116.05
NetR52_2: 
NetR72_1: R72.1 U5.3 | length 9.7
  Top Layer w0.4: R72.1@94.309,18.714 94.35,18.756 v1@94.35,20.2 ; v1(94.35,26.9) 94.37,26.88 U5.3@95.796,26.88
  Bottom Layer w0.4: v1@94.35,20.2 v1(94.35,26.9)
  other v1: 94.35,20.6
NetR73_2: R73.2 U5.7 | length 10.1
  Top Layer w0.4: v1(86.6,21.35) 86.636,21.314 R73.2@88.509,21.314 ; v1(87.05,25.65) 87.09,25.61 U5.7@90.096,25.61
  Bottom Layer w0.4: v1(86.6,21.35) 87.8,22.55 87.8,24.85 87.05,25.6 v1(87.05,25.65)
NetR89_2: R89.2 R90.1 U8.3 | length 39.9
  Top Layer w0.4: v1(-3.2,96.75) -3.07,96.62 U8.3@27.45,96.62
  Bottom Layer w0.6: R89.2@-6.857,91.088 -3.468,91.088 -3.2,91.356 v1(-3.2,96.75)
NetR92_2: R92.2 R93.1 | length 2.4
  Top Layer w0.4: R93.1@216.109,84.214 R92.2@218.509,84.214
NetR94_2: R94.2 R95.1 | length 2.4
  Top Layer w0.4: R95.1@216.109,81.414 R94.2@218.509,81.414
NetR96_2: R96.2 R97.1 | length 2.5
  Top Layer w0.4: R97.1@216.05,78.7 216.064,78.714 R96.2@218.509,78.714
NetR98_2: R98.2 R99.1 | length 2.4
  Top Layer w0.4: R99.1@216.109,76.014 R98.2@218.509,76.014
NetR104_1: R104.1 U100.7 | length 4
  Top Layer w1: U100.7@164.904,111.063 167.129,113.288 R104.1@168.007,113.288
NetR105_2: R105.2 U100.2 | length 2.8
  Top Layer w0.4: R105.2@154.507,111.188 154.631,111.063 U100.2@157.284,111.063
NetR110_1: R110.1 U100.5 | length 3.6
  Top Layer w1: U100.5@164.904,105.983 166.1,104.788 R110.1@168.007,104.788
NetT100_7: 
NetT100_8: 
NetT100_10: 
NetU2_1: 
NetU2_5: 
NetU2_6: 
NetU2_7: 
NetU2_8: 
NetU2_9: 
NetU2_10: 
NetU2_16: 
NetU2_17: 
NetU13_3: 
NetU16_4: 
OFF1: JP1.25 R54.2 | length 15.6
  Top Layer w0.4: R54.2@218.488,59.293 219.843,59.293 221.05,60.5 JP1.25@233.589,60.5
OFF2: JP1.26 R55.2 | length 9
  Top Layer w0.4: R55.2@224.888,58.793 v1@226.243,58.793
  Bottom Layer w0.4: v1(226.5,59.05) 227.95,60.5 JP1.26@233.589,60.5
P0_0: U1.46
P0_1: U1.47
P0_2: J1.5 U1.98 | length 31.6
  Top Layer w0.25: U1.98@74.545,73.916 81.3,80.671 v1(81.3,81.05) ; v1(88,77.3) 93.55,77.3 v1(93.8,77.55)
  Bottom Layer w0.4: v1(81.3,81.05) 81.8,80.55 85.75,80.55 87.95,78.35 87.95,77.35 v1(88,77.3) ; v1(93.8,77.55) 94.14,77.21 J1.5@94.14,70.808
P0_3: J1.4 U1.99 | length 36.6
  Top Layer w0.25: U1.99@74.191,74.269 79.7,79.778 v1(79.7,81.8) ; v1(86.85,76.15) 86.95,76.25 94.95,76.25 v1(95.65,76.95)
  Bottom Layer w0.4: v1(79.7,81.8) 79.7,81 80.9,79.8 85.2,79.8 86.85,78.15 v1(86.85,76.15) ; v1(95.65,76.95) 96.68,75.92 J1.4@96.68,70.808
P0_5: U1.80
P0_6: U1.79
P0_7: U1.78
P0_8: U1.77
P0_9: U1.76
P0_10: Q5.3 U1.48 | length 50.7
  Top Layer w0.25: v1(61.1,46.65) 62,46.65 69.848,54.498 69.848,55.077 U1.48@70.656,55.884
  Top Layer w0.5: Q5.3@59.695,10.694 59.7,10.699 v1(59.7,13.15)
  Bottom Layer w0.4: v1(59.7,13.15) 59.75,13.2 59.75,39.1 61.2,40.55 61.2,42.85 60.65,43.4 60.65,44.95 61.1,45.4 v1(61.1,46.65)
P0_15: U1.62 U5.6 | length 74.7
  Top Layer w0.25: U1.62@77.727,59.066 78.543,58.25 79.75,58.25 84.85,53.15 92.5,53.15
  Top Layer w0.4: 92.5,53.15 94.4,53.15 94.8,52.75 95.8,52.75 97.2,54.15 100.4,54.15 103,56.75 104.45,56.75 v1(104.6,56.6)
  Top Layer w0.5: U5.6@90.096,26.88 91.43,26.88 94.1,29.55 101.9,29.55 103.65,31.3 v1(106,31.3)
  Bottom Layer w0.4: v1(104.6,56.6) 105.9,55.3 105.9,53.2 v1@105.9,31.35
P0_17: U1.61 U5.2 | length 65.3
  Top Layer w0.25: U1.61@77.373,58.713 78.286,57.8 79.35,57.8 84.7,52.45 92.5,52.45
  Top Layer w0.4: 92.5,52.45 94.15,52.45 94.6,52 96.1,52 97.45,53.35 100.8,53.35 101.95,54.5 v1(102.3,54.5) ; U5.2@95.796,25.61 101.96,25.61 v1(103.15,26.8)
  Bottom Layer w0.4: v1(102.3,54.5) 102.3,53.35 102.6,53.05 102.6,51.95 102.3,51.65 102.3,50.05 103.7,48.65 103.7,31 103.15,30.45 v1(103.15,26.8)
P0_18: U1.60 U5.5 | length 62
  Top Layer w0.25: U1.60@77.019,58.359 78.079,57.3 78.95,57.3 84.5,51.75 92.5,51.75
  Top Layer w0.4: U5.5@90.096,28.15 91.05,28.15 93.6,30.7 v1(101.25,30.7) ; 92.5,51.75 93.75,51.75 94.2,51.3 96.45,51.3 97.7,52.55 101.4,52.55 v1(101.45,52.5)
  Bottom Layer w0.4: v1(101.25,30.7) v1@101.3,52.55
P0_19: Q2.1 R121.1 R122.1 U1.59 | length 117.5
  Top Layer w0.25: U1.59@76.666,58.006 77.922,56.75 78.75,56.75 84.35,51.15 87,51.15 87.3,50.85 v1(87.3,50.75)
  Top Layer w0.4: v1(86.85,56.05) 87.8,57 91.25,57 91.45,57.2 97.55,57.2 98.7,58.35 v1(98.7,58.55) ; v1(98.75,18.7) 110.85,18.7 112.15,17.4 133.7,17.4 134.6,18.3 139.85,18.3 141,18.3 141.888,19.188 Q2.1@142.671,19.188
  Bottom Layer w0.4: v1(86.85,56.05) 87.3,55.6 v1(87.3,50.75) ; v1(98.7,58.55) 98.7,56.8 98.45,56.55 98.45,55.55 98.75,55.25 v1(98.75,18.7)
P0_20: Q3.1 R123.1 R126.1 U1.58 | length 112.3
  Top Layer w0.25: U1.58@76.312,57.652 77.714,56.25 78.45,56.25 82.1,52.6 82.1,51.25 v1(82.2,51.25)
  Top Layer w0.4: v1(82.75,39.1) 84.2,39.1 84.55,39.45 85.4,39.45 85.6,39.25 v1(97.6,39.25) ; v1(97.3,19) 98.05,19.75 99.4,19.75 99.7,19.45 111.35,19.45 112.45,18.35 132.25,18.35 v1@132.45,18.55 ; v1(132.4,26.5) 132.5,26.4 140.4,26.4 141.188,27.188 Q3.1@142.671,27.188
  Bottom Layer w0.4: v1(82.2,51.25) 82.1,51.15 82.1,39.75 v1(82.75,39.1) ; v1(97.3,19) 97.9,19.6 97.9,36 97.6,36.3 v1(97.6,39.25) ; v1(132.4,18.5) v1(132.4,26.5)
P0_21: Q4.1 R124.1 R127.1 U1.57 | length 97.2
  Top Layer w0.25: U1.57@75.959,57.299 77.607,55.65 78.2,55.65 81.05,52.8 v1(81.05,52.15)
  Top Layer w0.4: v1(85.1,56.8) 85.45,56.8 86.55,57.9 96.3,57.9 v1(96.9,58.5) ; v1(96.6,34.6) 97.1,34.7 121.1,34.7 121.4,35 123.2,35 123.75,34.45 141.85,34.45 Q4.1@142.6,35.2
  Bottom Layer w0.4: v1(81.05,52.15) 85.1,56.2 v1(85.1,56.8) ; v1(96.6,34.6) 96.5,35.3 96.5,58.1 v1(96.9,58.5)
P0_22: Q7.1 R125.1 R128.1 U1.56 | length 156.4
  Top Layer w0.25: U1.56@75.605,56.945 80.1,52.45 v1(80.1,50.75) v1@79.95,50.9
  Top Layer w0.4: v1(80.1,44.1) 79.95,44.1 80.025,44.025 80.25,43.8 83.3,43.8 85.4,45.9 99.1,45.9 100.05,46.85 104.75,46.85 108.35,50.45 120.35,50.45 121.8,51.9 124.55,51.9 125.5,50.95 140.9,50.95 141.35,50.5 160,50.5 163.1,53.6 177.55,53.6 177.65,53.7 181.5,53.7 v1(182.5,52.7) ; R128.1@182,30.3 184.65,30.3 185.65,29.3 185.65,25.65 187.329,23.971 Q7.1@187.612,23.971
  Bottom Layer w0.4: v1(80.1,44.1) v1(80.1,50.75) ; v1(182.5,52.7) 182.5,30.7 v1(182.9,30.3)
P0_23: U1.9 U4.3 | length 233.6
  Top Layer w0.25: v1(48.8,83.15) 56,83.15 57.25,81.9 61.25,81.9 61.65,81.5 61.65,80.45 62.55,79.55 62.55,77.778 U1.9@68.534,71.794
  Top Layer w0.4: v1(48.75,35) 48.8,34.95 89.65,34.95 90.5,35.8 134.25,35.8 134.95,36.5 139.3,36.5 139.7,36.9 165.05,36.9 165.4,36.55 168.75,36.55 169.1,36.9 183.1,36.9 184.95,35.05 197.15,35.05 v1(198.8,33.4) ; U4.3@197.07,28.712 198.788,28.712 v1(198.8,28.7)
  Bottom Layer w0.4: v1(48.75,35) 48.35,35.4 48.35,82.7 v1(48.8,83.15) ; v1(198.8,28.7) v1(198.8,33.4)
P0_24: U1.8 U10.3 | length 217.5
  Top Layer w0.25: v1(49.25,84.85) 49,84.85 49.125,84.725 50,83.85 56.1,83.85 57.6,82.35 61.5,82.35 62.15,81.7 62.15,80.65 63.05,79.75 63.05,77.986 U1.8@68.888,72.148
  Top Layer w0.4: v1(46.85,35.3) 47.65,36.1 49.3,36.1 49.75,35.65 89.1,35.65 90.15,36.7 133.9,36.7 134.55,37.35 138.95,37.35 139.55,37.95 165.5,37.95 165.85,37.6 168.35,37.6 168.7,37.95 v1(173.75,37.95) ; U10.3@172.075,28.705 173.795,28.705 v1(173.8,28.7)
  Bottom Layer w0.4: v1(46.85,35.3) 46.85,37.1 47.45,37.7 47.45,42.5 47.55,42.6 47.55,83.5 48.9,84.85 v1(49.25,84.85) ; v1(173.75,37.95) 173.75,28.75 v1(173.8,28.7)
P0_25: U1.7 U11.3 | length 166.9
  Top Layer w0.25: v1(43.55,84.35) 46.95,84.35 48.45,85.85 49.85,85.85 51.2,84.5 56.25,84.5 57.85,82.9 61.7,82.9 62.6,82 62.6,81.05 63.55,80.1 63.55,78.15 U1.7@69.3,72.4
  Top Layer w0.4: v1(44.35,35.6) 45.2,35.6 46.5,36.9 49.9,36.9 50.35,36.45 74.75,36.45 76.2,37.9 77.25,37.9 77.9,37.25 88.45,37.25 89.65,38.45 96.75,38.45 97,38.2 98.2,38.2 98.45,38.45 113.9,38.45 v1(114.25,38.8) ; U11.3@112.775,28.705 114.295,28.705 v1(114.3,28.7)
  Bottom Layer w0.4: v1(43.55,84.35) 43.65,84.25 43.65,36.3 v1(44.35,35.6) ; v1@114.25,39 114.3,38.95 v1(114.3,28.7)
P0_26: C42.1 D7.2 R71.1 U1.6 | length 153.2
  Top Layer w0.25: 63.5,82.95 63.1,82.55 63.1,81.35 64.1,80.35 64.1,78.35 U1.6@69.595,72.855
  Top Layer w0.4: 63.5,82.95 81.15,82.95 v1(81.3,82.8) ; v1@84.95,7.7 84.95,6.269 C42.1@84.893,6.212 84.901,6.22 87.807,6.22 R71.1@87.807,8.988 ; v1(88.35,55.95) 88.5,55.8 91.35,55.8 91.95,56.4 98.15,56.4 100.25,58.5 105.8,58.5 v1(106.05,58.75) ; v1(89.2,78.35) 89.5,78.65 96,78.65 97.3,77.35 102.05,77.35 102.45,76.95 104.45,76.95 104.7,77.2 v1(106.05,77.2)
  Bottom Layer w0.4: v1(81.3,82.8) 82.75,81.35 86.2,81.35 v1(89.2,78.35) ; v1@84.95,7.7 84.95,12.75 88.55,16.35 88.5,16.4 88.5,41.75 88.75,42 88.75,43.25 88.35,43.65 v1(88.35,55.95) ; v1(106.05,58.75) 106.3,59 106.3,76.85 106,77.15 v1(106.05,77.2)
  other v1: 84.95,8.05
P0_27: R29.2 R35.1 U1.25 | length 58.2
  Top Layer w0.25: v1(56.9,67.25) 57.25,67.6 61.415,67.6 U1.25@62.877,66.137
  Top Layer w0.4: R35.1@48.312,25.007 56.843,25.007 v1@56.85,25 ; R29.2@51.558,25.248 R29.2@51.693,25.112
  Bottom Layer w0.4: v1@56.85,25 57.05,25.2 57.05,41.7 57.45,42.1 57.45,63.6 57.1,63.95 57.1,67.05 v1(56.9,67.25)
  other v1: 56.75,25.007 50,25.15
P0_29: JP4.12 U1.29 | length 23.5
  Top Layer w0.25: 57.8,63.65 59.6,61.85 63.186,61.85 U1.29@63.938,62.602
  Top Layer w0.4: JP4.12@45,70.44 48.99,66.45 56.2,66.45 57.1,65.55 57.1,64.35 57.8,63.65
P0_30: JP4.11 U1.30 | length 23
  Top Layer w0.25: 57.2,63.2 59.05,61.35 63.393,61.35 U1.30@64.292,62.248
  Top Layer w0.4: JP4.11@45,67.9 45.55,67.9 48.1,65.35 56.1,65.35 56.35,65.1 56.35,64.05 57.2,63.2
P1_0: U1.95 U3.3 | length 62.4
  Top Layer w0.25: U1.95@75.605,72.855 83,80.25 v1(83,82.65) ; v1(77.7,115.1) 80.3,115.1 U3.3@85.95,109.45
  Top Layer w0.4: v1(76.65,88) 82.95,88 v1(83.05,87.9)
  Bottom Layer w0.4: v1(76.65,88) 76.65,96.7 77.75,97.8 77.75,99.15 77.7,99.2 v1(77.7,115.1) ; v1(83,82.65) v1@83,87.55
P1_1: U1.94 U3.4 | length 60.2
  Top Layer w0.25: U1.94@75.959,72.537 84.55,81.128 v1(84.55,82.65) ; v1(78.8,113.9) 80.816,113.9 U3.4@85.569,109.148
  Top Layer w0.4: v1(78.6,89.25) 78.95,88.9 v1@84.6,88.9
  Bottom Layer w0.4: v1(78.6,89.25) 78.4,89.25 77.75,89.9 77.75,96.65 78.5,97.4 78.5,113.6 v1(78.8,113.9) ; v1(84.55,82.65) v1(84.55,88.7)
P1_4: U1.93 U3.2 | length 64.6
  Top Layer w0.25: U1.93@76.312,72.148 86.1,81.936 v1(86.1,82.65) ; v1(79.4,116.15) 79.981,116.15 U3.2@86.276,109.855
  Top Layer w0.4: v1(79.6,90.3) 80.2,89.7 v1(86.1,89.7)
  Bottom Layer w0.4: v1(79.4,116.15) 79.8,115.75 79.8,113.25 79.3,112.75 79.3,97.15 78.8,96.65 78.8,91.1 v1(79.6,90.3) ; v1(86.1,82.65) v1(86.1,89.7)
P1_8: U1.92 U3.40 | length 66.9
  Top Layer w0.25: U1.92@76.666,71.794 87.522,82.65 99.2,82.65 v1(99.15,82.6) ; U3.40@91.473,107.38 96.593,112.5 v1(99.2,112.5)
  Bottom Layer w0.4: v1(99.15,82.6) 99.15,112.45 v1(99.2,112.5)
P1_9: U1.91 U3.43 | length 73.5
  Top Layer w0.25: U1.91@77.019,71.441 87.679,82.1 98.15,82.1 99,81.25 v1(99.2,81.25) ; U3.43@90.413,108.44 95.572,113.6 96.566,113.6 96.766,113.8 100.25,113.8 v1(101.45,112.6)
  Bottom Layer w0.4: v1@99.15,81.25 99.35,81.25 100.15,82.05 100.15,83.15 99.95,83.35 99.95,111.4 101.15,112.6 v1(101.45,112.6)
P1_10: U1.90 U3.44 | length 77.3
  Top Layer w0.25: U1.90@77.373,71.087 87.836,81.55 97.35,81.55 98.6,80.3 100.1,80.3 v1(100.5,80.7) ; U3.44@90.059,108.794 95.265,114 96.4,114 96.75,114.35 102.05,114.35 v1(102.5,113.9)
  Bottom Layer w0.4: v1(100.5,80.7) 100.9,81.1 100.9,83.55 100.7,83.75 100.7,110.1 102.5,111.9 v1(102.5,113.9)